# Altium PCB PCB1.PcbDoc
Units mil, origin at the board's own origin, x right, y up, seen from the top; angles counter-clockwise.
Board outline 8120.03 x 5745.03 mil, 2 copper layers (Top Layer, Bottom Layer); 86 components, 126 nets, 431 pads, 20 vias.
Unrouted connection lines stored in the file: 4.
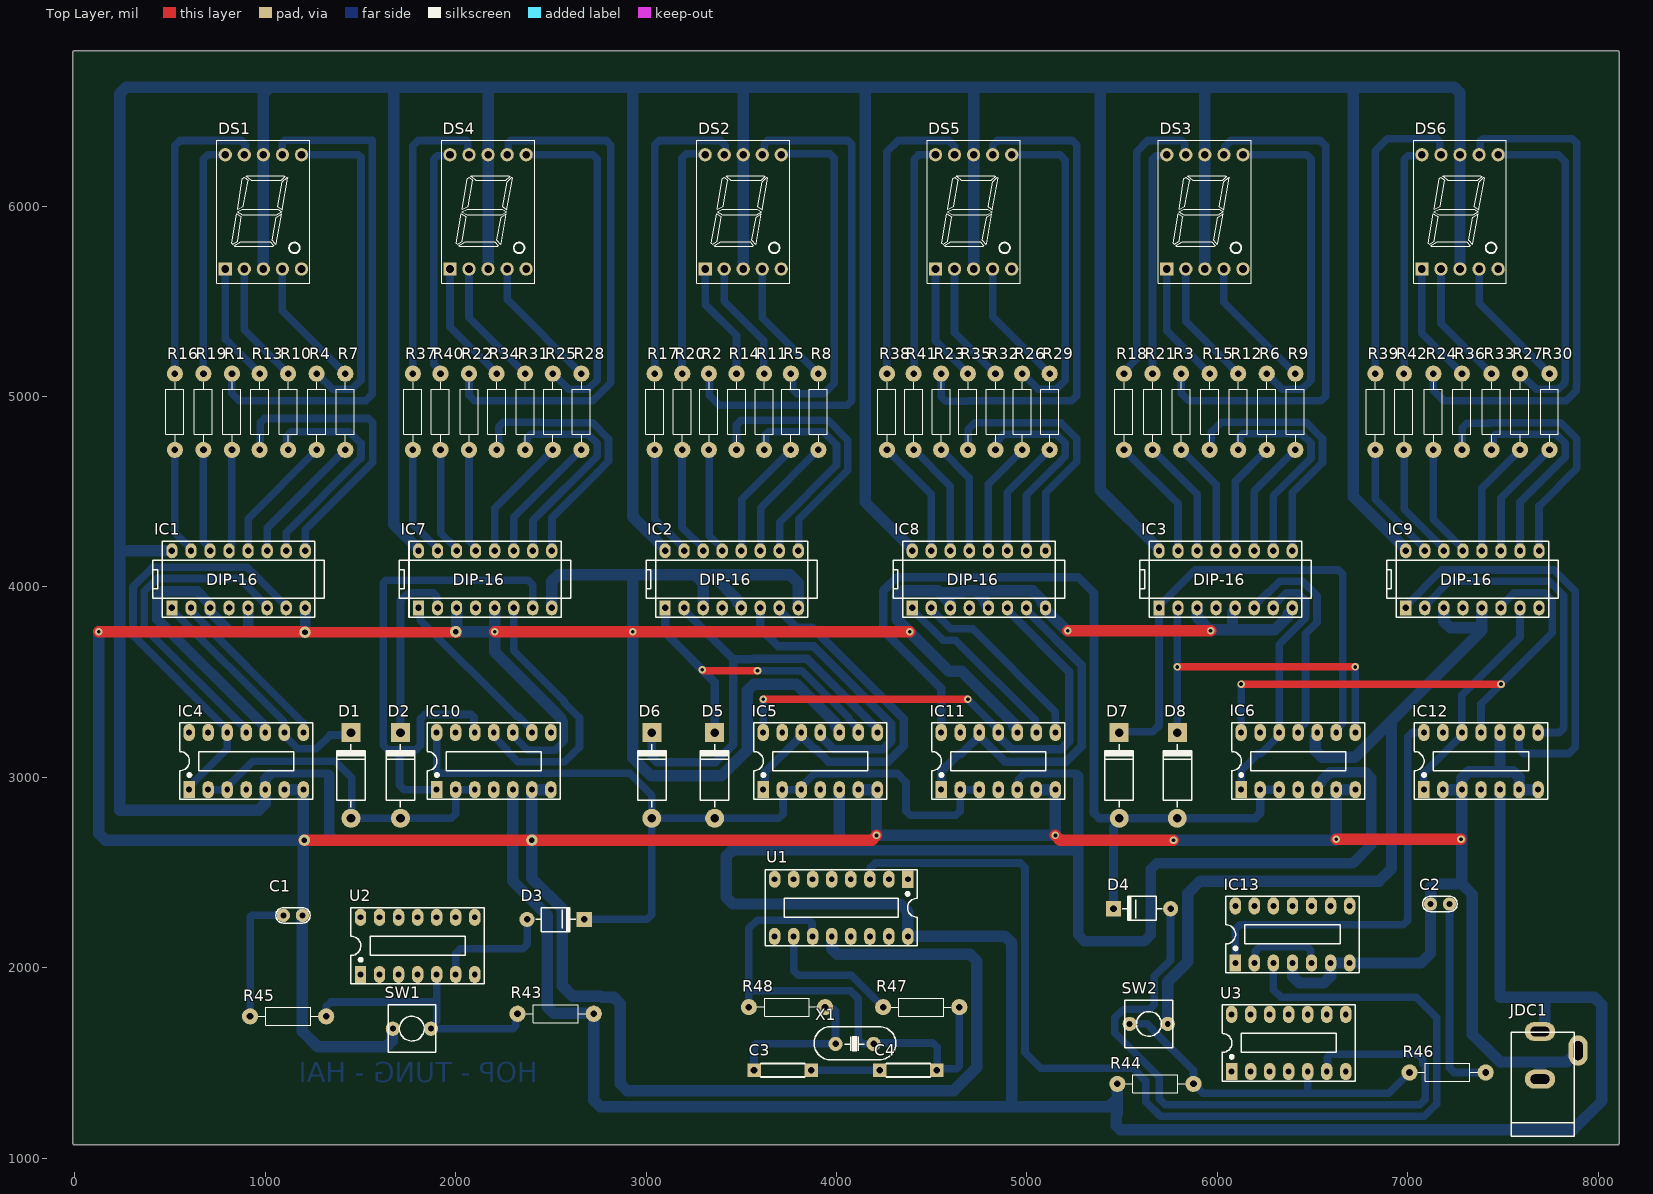
[diagram p0: Top Layer view]
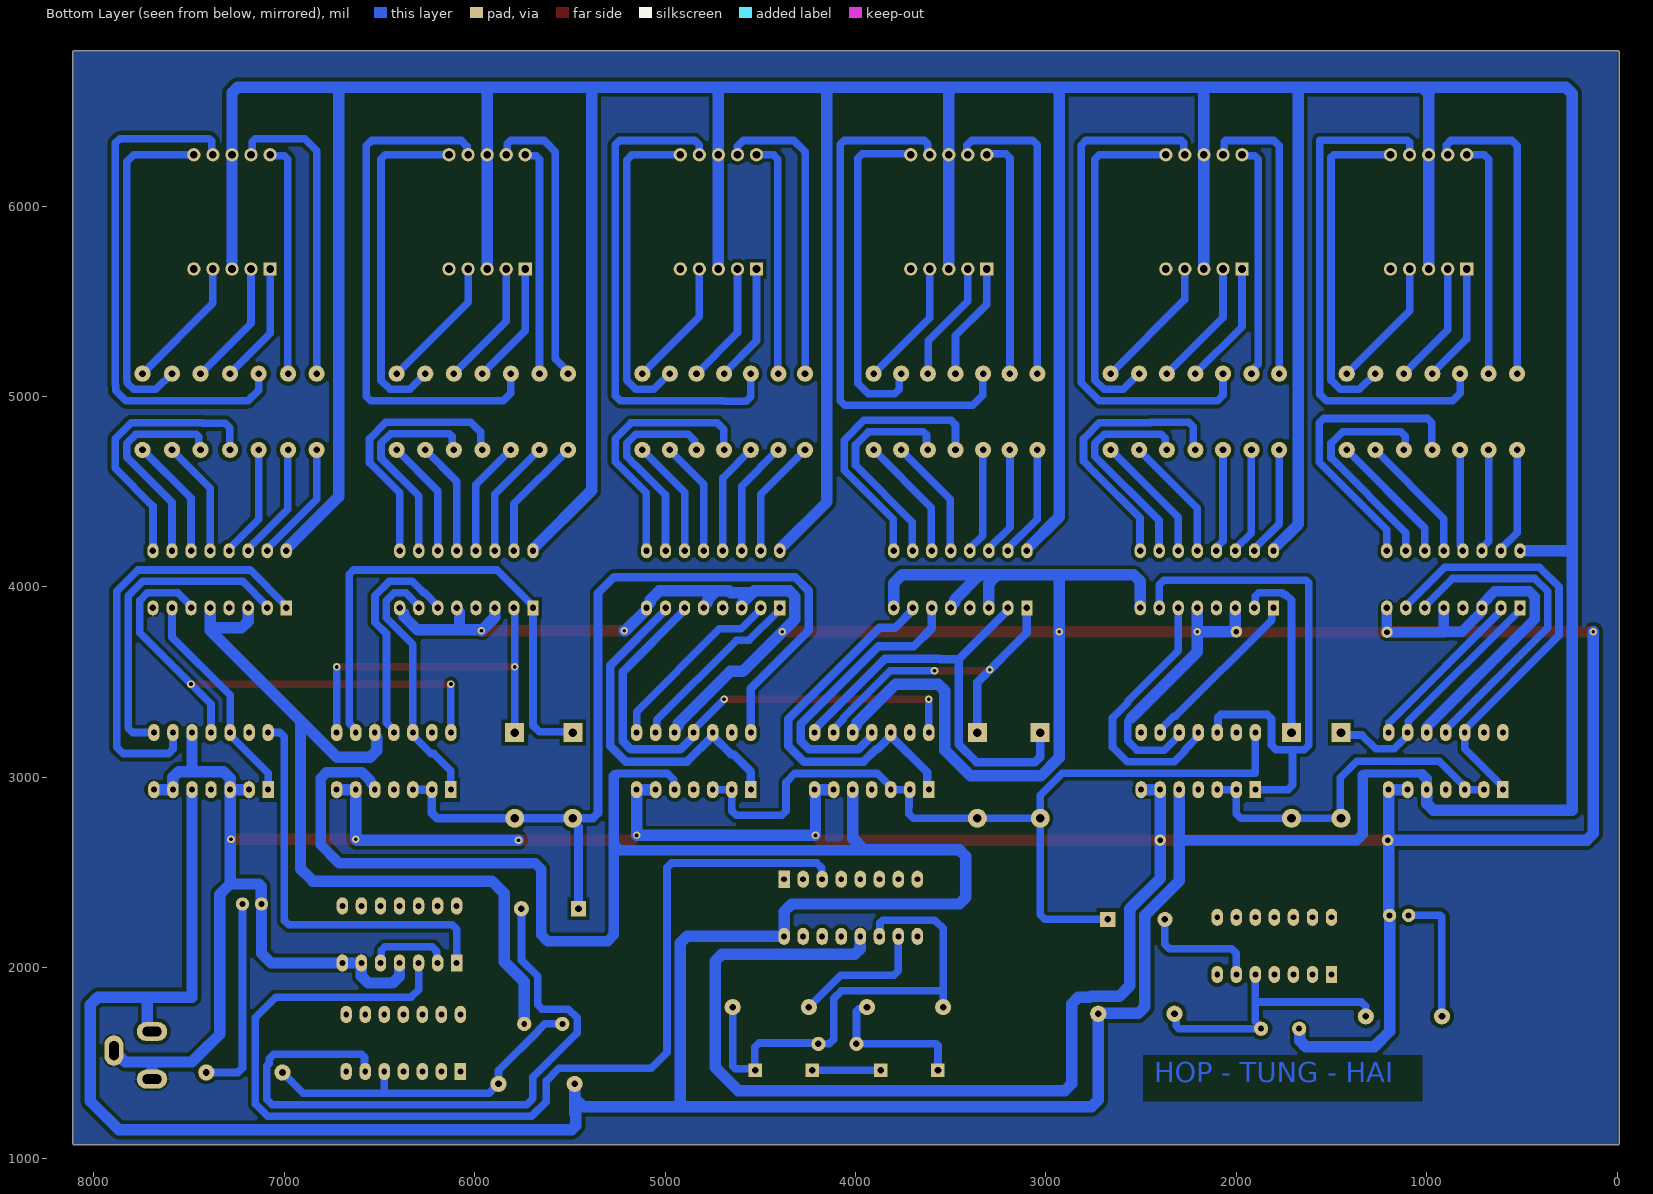
[diagram p1: Bottom Layer view, seen from below]
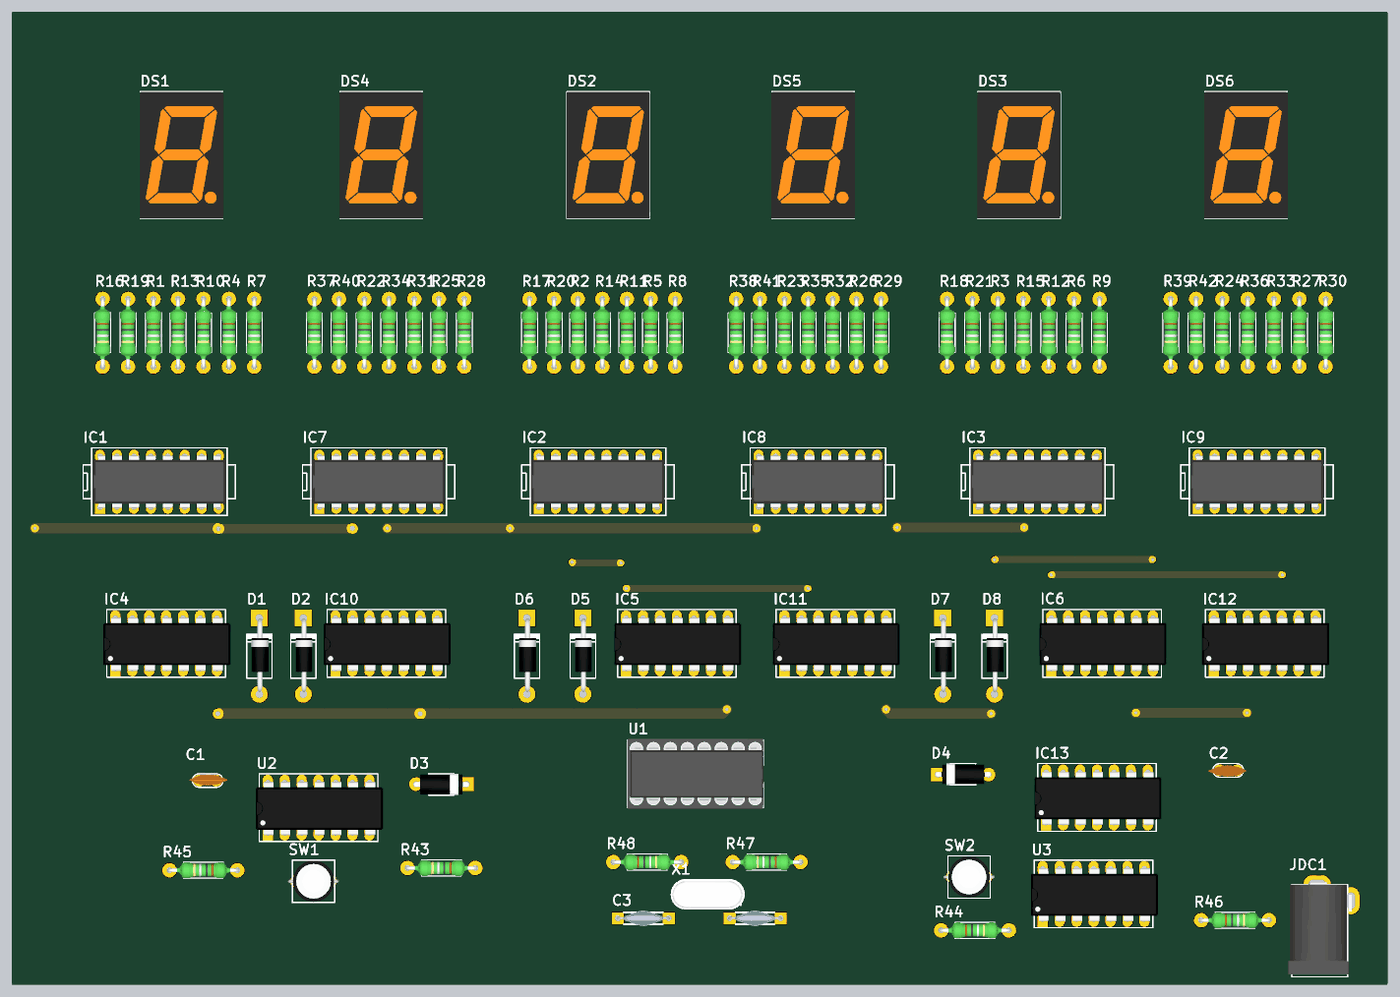
[diagram p2: 3D render of the assembled board from above, using the file's embedded part models]

## Layer stack, top to bottom
Top Solder: solder mask 0.4, Solder Resist, Dk 3.5
Top Layer: signal copper 1.4
Dielectric 1: dielectric 12.6, FR-4, Dk 4.8
Bottom Layer: signal copper 1.4
Bottom Solder: solder mask 0.4, Solder Resist, Dk 3.5

## Board outline
-5,1069.98 cw(c-5,1075) -10.02,1075 -10.02,6810 cw(c-5,6810) -5,6815.02 8105,6815.02 cw(c8105,6810) 8110.01,6810 8110.02,1075 cw(c8105,1075) 8105,1069.98

## Design rules (kind name [scope] priority, off if disabled: settings)
Clearance [All] p1: gap=20 ignorepadtopadclearanceinfootprint=TRUE
PolygonConnect [All] p1: connectstyle=Relief reliefconductorwidth=10 reliefentries=4 polygonreliefangle="90 Angle" airgapwidth=10
RoutingVias [All] p1: holewidth=20 width=40 viastyle="Through Hole" minholewidth=20 minwidth=40 maxholewidth=20 maxwidth=40
SolderMaskExpansion [All] p1: expansion=4 istentingtop=FALSE
Width [All] p1: maxlimit=60 minlimit=40 preferedwidth=55 checkconnectedcopper=TRUE
30 further rules are at their usual default settings.

## Components (designator, comment, footprint, x,y, rotation, side; value= is the part's Value field where it differs from the comment)
C1 "104" "Cap 2.54mm" 1095,2275 r0 top
C2 "104" "Cap 2.54mm" 7220,2335 r180 top
C3 "10pF" "Cap 7.5mm" 3867.07,1461.35 r180 top
C4 "10pF" "Cap 7.5mm" 4527.07,1461.35 r180 top
D1 "1N4007" D2A 1450,3235 r270 top
D2 "1N4007" D2A 1710,3235 r270 top
D3 "1N4007" DO-41 2325,2254.02 r180 top
D4 "1N4007" DO-41 5805,2310 r0 top
D5 "1N4007" D2A 3360,3235 r270 top
D6 "1N4007" D2A 3030,3235 r270 top
D7 "1N4007" D2A 5485,3235 r270 top
D8 "1N4007" D2A 5790,3235 r270 top
DS1 "7SEG" LED7SEG-1-0.56 985,5945 r0 top
DS2 "7SEG" LED7SEG-1-0.56 3505,5945 r0 top
DS3 "7SEG" LED7SEG-1-0.56 5930,5945 r0 top
DS4 "7SEG" LED7SEG-1-0.56 2165,5945 r0 top
DS5 "7SEG" LED7SEG-1-0.56 4715,5945 r0 top
DS6 "7SEG" LED7SEG-1-0.56 7270,5945 r0 top
IC1 "7447" DIP16#1 860,4040 r0 top value="7447 , 74247"
IC2 "7447" DIP16#1 3450,4040 r0 top value="7447 , 74247"
IC3 "7447" DIP16#1 6044.24,4040.08 r0 top value="7447 , 74247"
IC4 "7490" DIP14 600,2935.5 r0 top
IC5 "7490" DIP14 3615,2935.5 r0 top
IC6 "7490" DIP14 6125,2935.5 r0 top
IC7 "7447" DIP16#1 2155,4040 r0 top value="7447 , 74247"
IC8 "7447" DIP16#1 4748.18,4040.08 r0 top value="7447 , 74247"
IC9 "7447" DIP16#1 7340.29,4040.08 r0 top value="7447 , 74247"
IC10 "7490" DIP14 1900,2935.5 r0 top
IC11 "7490" DIP14 4550,2935.5 r0 top
IC12 "7490" DIP14 7085,2935.5 r0 top
IC13 "4013" DIP14 6095,2025 r0 top
JDC1 "Jac DC" DC0 7795,1540 r90 top
R1 "1K" RES-1/4W 830,4935 r90 top
R2 "1K" RES-1/4W 3335,4935 r90 top
R3 "1K" RES-1/4W 5815,4935 r90 top
R4 "1K" RES-1/4W 1275,4935 r90 top
R5 "1K" RES-1/4W 3765,4935 r90 top
R6 "1K" RES-1/4W 6265,4935 r90 top
R7 "1K" RES-1/4W 1425,4935 r90 top
R8 "1K" RES-1/4W 3910,4935 r90 top
R9 "1K" RES-1/4W 6415,4935 r90 top
R10 "1K" RES-1/4W 1125,4935 r90 top
R11 "1K" RES-1/4W 3625,4935 r90 top
R12 "1K" RES-1/4W 6115,4935 r90 top
R13 "1K" RES-1/4W 975,4935 r90 top
R14 "1K" RES-1/4W 3480,4935 r90 top
R15 "1K" RES-1/4W 5965,4935 r90 top
R16 "1K" RES-1/4W 530,4935 r90 top
R17 "1K" RES-1/4W 3050,4935 r90 top
R18 "1K" RES-1/4W 5515,4935 r90 top
R19 "1K" RES-1/4W 680,4935 r90 top
R20 "1K" RES-1/4W 3195,4935 r90 top
R21 "1K" RES-1/4W 5665,4935 r90 top
R22 "1K" RES-1/4W 2075,4935 r90 top
R23 "1K" RES-1/4W 4555,4935 r90 top
R24 "1K" RES-1/4W 7140,4935 r90 top
R25 "1K" RES-1/4W 2515,4935 r90 top
R26 "1K" RES-1/4W 4980,4935 r90 top
R27 "1K" RES-1/4W 7595,4935 r90 top
R28 "1K" RES-1/4W 2665,4935 r90 top
R29 "1K" RES-1/4W 5125,4935 r90 top
R30 "1K" RES-1/4W 7750,4935 r90 top
R31 "1K" RES-1/4W 2370,4935 r90 top
R32 "1K" RES-1/4W 4840,4935 r90 top
R33 "1K" RES-1/4W 7445,4935 r90 top
R34 "1K" RES-1/4W 2220,4935 r90 top
R35 "1K" RES-1/4W 4695,4935 r90 top
R36 "1K" RES-1/4W 7290,4935 r90 top
R37 "1K" RES-1/4W 1780,4935 r90 top
R38 "1K" RES-1/4W 4270,4935 r90 top
R39 "1K" RES-1/4W 6835,4935 r90 top
R40 "1K" RES-1/4W 1925,4935 r90 top
R41 "1K" RES-1/4W 4410,4935 r90 top
R42 "1K" RES-1/4W 6985,4935 r90 top
R43 "10K" RES-1/4W 2540,1753.3 r0 top
R44 "10K" RES-1/4W 5660,1395 r180 top
R45 "10K" RES-1/4W 1135,1740 r0 top
R46 "10K" RES-1/4W 7195,1455 r180 top
R47 "47M" RES-1/4W 4460,1788.3 r0 top
R48 "2k2" RES-1/4W 3725,1798.31 r180 top
SW1 "SW" "SW2 6x6MM Circle" 1670,1680 r0 top value="SW chip 2 pin"
SW2 "SW" "SW2 6x6MM Circle" 5740,1705 r180 top value="SW chip 2 pin"
U1 "4060" DIP16#2 3670,2465 r270 top
U2 "7414" DIP14 1500,1965 r0 top
U3 "7414" DIP14 6075,1455 r0 top
X1 "32856Mhz" XT2 4095,1600 r0 top value=4Mhz

## Footprints (in the part's own frame and the unit in brackets; to place one, negate y for a bottom-side part, rotate by r counter-clockwise, add the part's x,y. Pads: shape width x height; smd on the part's side, far side on the other; paste and mask are expansions set on the pad)
"Cap 2.54mm" [mil]
  round 70 hole 31: 1(0,0) 2(100,0)
  silkscreen extent -40,-40 141,40, body extent -60,-30 170,37, height 265
"Cap 7.5mm" [mm] "103 2KV"
  rect 1.8x1.8 hole 0.9: 1(0,0) 2(7.62,0)
  silkscreen extent 0.89,-0.89 6.73,0.89, body extent -0.19,-1.2 7.81,1.19, height 9.03
D2A [mil] "Diode 2A, W 150mil, L 450mil"
  round 100 hole 45: 1(450,0)
  rect 100x100 hole 45: 2(0,0)
  silkscreen extent 61,-75 391,75, body extent 5,-47 435,54, height 100
DC0 [mil] "Jac DC input"
  oval 100x160 hole 50 slot 100 at 90 deg: 1(125,100) 2(-125,100)
  oval 160x100 hole 50 slot 100 at 0 deg: 3(25,-100)
  silkscreen extent -425,-80 120,250, body extent -410,-105 134,269, height 434
DIP14 [mil] "DIP, 14-Leads, Row Spacing 7.62mm, Pitch 2.54mm, Body 19.2x6.6mm"
  rect 60x90 hole 31: 1(0,0)
  oval 60x90 hole 31: 2(100,0) 3(200,0) 4(300,0) 5(400,0) 6(500,0) 7(600,0) 8(600,300) 9(500,300) 10(400,300) 11(300,300) 12(200,300) 13(100,300) 14(0,300)
  silkscreen extent -50,-50 650,350, body extent -70,-12 680,302, height 145
DIP16#1 [mm]
  rect 1.5x2 hole 0.864: 1(-8.897,-3.812)
  oval 1.5x2 hole 0.864: 2(-6.357,-3.812) 3(-3.817,-3.812) 4(-1.277,-3.812) 5(1.263,-3.812) 6(3.803,-3.812) 7(6.343,-3.812) 8(8.883,-3.812) 9(8.883,3.808) 10(6.343,3.808) 11(3.803,3.808) 12(1.263,3.808) 13(-1.277,3.808) 14(-3.817,3.808) 15(-6.357,3.808) 16(-8.897,3.808)
  silkscreen extent -11.44,-5.08 11.42,5.08, body extent -10,-3.93 10,3.94, height 1.99
DIP16#2 [mm] "16 PIN, W 300mil, Pin to pin 100mil"
  rect 2.286x1.524 hole 0.787: 1(0,17.907)
  oval 2.286x1.524 hole 0.787: 2(0,15.367) 3(0,12.827) 4(0,10.287) 5(0,7.747) 6(0,5.207) 7(0,2.667) 8(0,0.127) 9(7.62,0.127) 10(7.62,2.667) 11(7.62,5.207) 12(7.62,7.747) 13(7.62,10.287) 14(7.62,12.827) 15(7.62,15.367) 16(7.62,17.907)
  silkscreen extent -1.27,-1.14 8.89,19.19, body extent -1.46,-1.19 9.04,19.22, height 7.61
DO-41 [mil] "Diode 1A"
  round 80 hole 35: 1(-50,0)
  rect 80x80 hole 35: 2(-350,0)
  silkscreen extent -305,-61 -95,65, body extent -366,-61 -34,65, height 122
LED7SEG-1-0.56 [mil]
  rect 70x70 hole 40: 1(-195,-275)
  round 70 hole 40: 2(-95,-275) 3(5,-275) 4(105,-275) 5(205,-275) 6(205,325) 7(105,325) 8(5,325) 9(-95,325) 10(-195,325)
  silkscreen extent -239,-350 249,400, body extent -241,-349 251,399, height 315
RES-1/4W [mil]
  round 85 hole 35: 1(-215,5) 2(185,5)
  silkscreen extent -173,-42 141,52, body extent -227,-42 197,52, height 95
"SW2 6x6MM Circle" [mil] "SW button 2pin, 250x 250 mil 6x6mm"
  round 75 hole 31: 1(0,0) 2(200,0)
  silkscreen extent -25,-125 225,125, body extent -52,-122 251,122, height 181
XT2 [mil] "Footpin for Crystal 2 pin"
  round 75 hole 34: 1(-100,0) 2(100,0)
  silkscreen extent -213,-83 217,90, body extent -216,-87 216,90, height 144

## Part data
C1 C2 C3 C4: library part CN, "Capacitor"
D1 D2 D5 D6 D7 D8: library part D1A, "Diode 1A"
D3 D4: library part "Diode 1A", "Diode 1A 1N4007 DO-41"
DS1 DS2 DS3 DS4 DS5 DS6: library part LED7SEG-1, "14.2 mm General Purpose Blue 7-Segment Display: CC, RH DP, Gray Surface", Colour=Blue, PackageDocument=24-Sep-2002, ComponentLink1Description="Manufacturer Link", ComponentLink1URL=http://www.agilent.com/, DatasheetDocument=24-Sep-2002, LatestRevisionDate=17-Dec-2003, LatestRevisionNote="Schematic revised, PCB Footprint replaced.", MinimumIntensity="2020 ucd", Note="IF = 10 mA", PackageReference=H, Published=8-Jun-2000, Publisher="Altium Limited"
IC1 IC2 IC3 IC7 IC8 IC9: "BCD to 7-Segment Decoder/Driver"
IC4 IC5 IC6 IC10 IC11 IC12: "4-Bit Decade Counter"
IC13: "Dual D-Type Flip-Flop", Creat by=VanDungEvn@Gmail.com
JDC1: library part DCIN, "Jac DC input"
R1 R2 R3 R4 R5 R6 R7 R8 R9 R10 R11 R12 R13 R14 R15 R16 R17 R18 R19 R20 R21 R22 R23 R24 R25 R26 R27 R28 R29 R30 R31 R32 R33 R34 R35 R36 R37 R38 R39 R40 R41 R42 R43 R44 R45 R46 R47 R48: library part Res
SW1 SW2: library part SW2, "Switch button 2 pin"
U2 U3: "IC, M74HC04M, Hex Inverter, SO-14", Text Field1=ST, Text Field2=M74HC04M1R, Text Field3=Mouser, Text Field4=511-M74HC04M, Text Field5=SO-14, Text Field6=.22
X1: library part XT2, "Crystal, 32.768 KHz, -40 to 85 degC, 3.2 x 1.5 x 0.9 mm SMD"

## Free pads (board coordinates)
  round 60 hole 30: 2(1208.74,3762.5) 3(2000,3765) 4(1205,2670) 5(2400,2670)

## Via types
v1: diameter 40, hole 20, Top Layer to Bottom Layer, 20 vias

## Nets (pads, with @x,y where several pads share a name; then routed paths per layer and width w, separated by ;. In a path a pad name is that pad's centre, name@x,y a point inside that pad or via, vN(x,y) a via of type N, cw(c..) or ccw(c..) an arc to the next point about the centre after c; other vN are vias at no path point)
5: IC13.2 IC13.5 | length 439.6
  Bottom Layer w40: IC13.2 6198.83,2028.83 6198.83,2085.4 6223.43,2110 6471.57,2110 6491.17,2090.4 6491.17,2028.83 IC13.5
+5: DS1.3 DS1.8 DS2.3 DS2.8 DS3.3 DS3.8 DS4.3 DS4.8 DS5.3 DS5.8 DS6.3 DS6.8 IC1.16 IC2.16 IC3.16 IC4.5 IC5.5 IC6.5 IC7.16 IC8.16 IC9.16 IC10.5 IC11.5 IC12.5 JDC1.1 R43.2 R44.2 U1.16 | length 50750.5
  Bottom Layer w40: 1025.5,3020.5 1324.5,3020.5 1335,3010 ; IC11.5 4953.83,2939.33 4953.83,2986.57 4987.76,3020.5 5254.5,3020.5 5265,3010
  Bottom Layer w55: IC4.5 1000.96,2936.46 1000.96,2992.96 1025.5,3017.5 ; 1335,3010 1335,2702.22 1367.22,2670 2295,2670 2300,2675 ; 3955,2617.5 5237.78,2617.5 5270,2649.72 ; 5265,3010 5270,3005 5270,2649.72 ; IC6.5 6525,2951.85 6547.5,2974.35 6547.5,2982.6 6592.9,3028 6777.56,3028 6809.78,2995.78 6809.78,2646.88 6712.9,2550 5682.22,2550 5650,2517.78 5650,2172.22 5617.78,2140 5302.22,2140 5270,2172.22 5270,2649.72
  Bottom Layer w60: IC1.16 245.25,4189.92 235.18,4200 ; DS1.3 DS1.8 990,6589.85 1025.15,6625 ; IC4.5 1000,2862.19 964.85,2827.04 235.18,2827.04 235.18,4200 ; IC7.16 1804.71,4198.82 1675,4328.53 1675,6625 ; DS4.3 DS4.8 2170,6615 2180,6625 ; IC10.5 2300,2675 2300,2456.3 2480,2276.3 2480,1795.15 2515.15,1760 2723.3,1760 R43.2 2725,1305.15 2760.15,1270 5430.07,1270 5470.22,1310.15 ; IC2.16 3099.71,4198.82 2930,4368.53 2930,6625 ; DS2.3 DS2.8 3510,6615 3520,6625 ; IC5.5 4015,2680 3955,2620 3455.15,2620 3420,2584.85 3420,2370.15 3455.15,2335 4334.85,2335 4375,2294.85 U1.16 4884.85,2165 4920,2129.85 4920,1290 ; IC8.16 4397.88,4198.9 4150,4446.78 4150,6615 4140,6625 ; DS5.3 DS5.8 4720,6625 ; R44.2 5475,1234.78 5470.22,1230 5470.22,1169.93 5490.15,1150 7870,1150 8020,1300 8020,1805 7980,1845 7720,1845 ; IC3.16 5693.94,4198.9 5385,4507.84 5385,6625 ; DS3.3 DS3.8 5935,6625 ; IC9.16 6990,4198.9 6715,4473.9 6715,6625 ; DS6.3 DS6.8 7275,6594.85 7244.85,6625 6715,6625 ; IC12.5 7485,1845 7720,1845 ; JDC1.1 7701.52,1665 7720,1683.48 7720,1845 ; 235.18,4200 235.18,6590.28 269.9,6625 1025.15,6625 ; 1025.15,6625 1675,6625 ; 1675,6625 2180,6625 ; 2180,6625 2930,6625 ; 2930,6625 3520,6625 ; 3520,6625 4140,6625 ; 4140,6625 4720,6625 ; 4720,6625 5385,6625 ; 5385,6625 5935,6625 ; 5935,6625 6715,6625
G: D1.1 D2.1 IC4.2 IC4.3 IC10.2 IC10.3 | length 1863
  Bottom Layer w40: IC4.2 IC4.3 806.53,2942.03 806.53,2957.03 934.5,3085 1367.07,3085 1455,2997.07 1455,2790 D1.1 D2.1 1976.57,2785 2000,2808.43 IC10.2 IC10.3
G1: IC1.7 IC4.1 IC4.12 | length 2295.6
  Bottom Layer w40: IC4.1 600,2950.5 800,3150.5 IC4.12 793.47,3242.03 793.47,3257.03 305.18,3745.32 305.18,4001.78 407.69,4104.29 905.18,4104.29 1109.71,3899.77 IC1.7
G2: D1.2 IC1.1 IC4.9 | length 1327.9
  Bottom Layer w40: IC1.1 509.71,3880.08 1096.17,3293.61 1096.17,3239.33 IC4.9 1100,3220.5 1170,3150.5 1268.25,3150.5 1340,3222.25 1437.25,3222.25 D1.2
G3: IC1.2 IC4.8 | length 898.9
  Bottom Layer w40: IC1.2 609.71,3875.69 1200,3285.39 IC4.8
G4: IC1.6 IC4.11 | length 1705.1
  Bottom Layer w40: IC4.11 893.47,3242.03 893.47,3257.03 365.18,3785.32 365.18,3976.93 432.54,4044.29 865.18,4044.29 1009.71,3899.77 IC1.6
G5: IC7.7 IC10.1 IC10.12 | length 2902.3
  Bottom Layer w40: IC10.1 1728.43,2935.5 1705,2958.93 1705,3132.5 1717.5,3145 ; IC10.12 2096.17,3239.33 2096.17,3315.4 2081.57,3330 1838.43,3330 1815,3306.57 1815,3168.43 1791.57,3145 1717.5,3145 ; IC7.7 2404.71,4011.57 2381.27,4035 1633.43,4035 1619.29,4020.86 1619.29,3925.56 1620,3924.85 1620,3168.43 1643.43,3145 1717.5,3145
G6: IC7.1 IC10.9 | length 906.6
  Bottom Layer w40: IC7.1 1814.23,3880.4 1814.23,3825.77 2319.5,3320.5 2328.99,3320.5 2400,3249.49 IC10.9
G7: D2.2 IC7.2 IC10.8 | length 972.6
  Bottom Layer w40: D2.2 1710,3930 1740,3960 1749.32,3960 1759.32,3970 1881.27,3970 1901.06,3950.21 1901.06,3893.57 IC7.2
G8: IC4.14 IC7.6 IC10.11 | length 1436.1
  Bottom Layer w40: IC10.11 2200,3215.44 2271.72,3143.72 2271.72,3136.65 2308.37,3100 2326.87,3081.5 2573.13,3081.5 2650,3158.37 2650,3312.63 2570,3392.63 2570,3398.75 2304.71,3664.04 IC7.6
GIO: D3.2 D5.1 D6.1 IC5.2 IC5.3 IC10.14 IC11.2 IC11.3 | length 4594.2
  Bottom Layer w40: IC10.14 1900,3021.5 2913.34,3021.5 3030,2904.84 D6.1 ; D3.2 3006.57,2254.02 3030,2277.45 D6.1 ; IC11.3 IC11.2 4650,2823.43 4626.57,2800 4388.43,2800 4365,2823.43 4365,2975 4319.5,3020.5 3885,3020.5 3815,2950.5 IC5.3 IC5.2 3718.83,2931.67 3718.83,2849.6 3720,2848.43 3720,2808.43 3696.57,2785 D5.1 D6.1
GND: C1.2 C2.2 IC1.3 IC1.5 IC1.8 IC2.3 IC2.5 IC2.8 IC3.3 IC3.5 IC3.8 IC4.6 IC4.7 IC4.10 IC5.6 IC5.7 IC5.10 IC6.6 IC6.7 IC6.10 IC7.3 IC7.5 IC7.8 IC8.3 IC8.5 IC8.8 IC9.3 IC9.5 IC9.8 IC10.6 IC10.7 IC10.10 IC11.6 IC11.7 IC11.10 IC12.2 IC12.3 IC12.6 IC12.7 IC12.10 IC13.4 IC13.6 IC13.7 JDC1.2 JDC1.3 pad.2 pad.3 pad.4 pad.5 SW1.1 SW2.1 U1.12 | length 41208.6
  Top Layer w55: v1(1208.74,3762.5) 1996.15,3762.5 1997.69,3764.04 pad.3@1998.37,3763.37
  Top Layer w60: v1(125,3765) 1206.24,3765 v1(1208.74,3762.5) ; pad.4 4185,2670 v1(4210,2695) ; pad.3 pad.3@2002.5,3762.5 ; v1(2205,3765) v1(4385,3765) ; v1(5150,2695) 5175,2670 v1(5770,2670) ; v1(5215,3770) v1(5965,3770) ; v1(6625,2675) v1(7280,2675)
  Bottom Layer w40: IC10.10 2300,3220.5 2377.5,3143 2521.49,3143 2570,3191.51 2570,3293.64 2551.82,3311.82
  Bottom Layer w55: IC1.3@710.48,3901.64 710.48,3878.21 711.23,3877.46 711.23,3869.62 815.85,3765 915,3765 910.48,3769.52 910.48,3889.15 IC1.5 ; IC1.3@711.23,3907.17 641.61,3976.79 460.5,3976.79 432.68,3948.97 432.68,3830.88 IC4.10@999.04,3264.51 ; 910.48,3762.5 v1(1208.74,3762.5) 1209.71,3832.22 IC1.8
  Bottom Layer w60: v1(125,3765) 125.15,3764.85 125.15,2705.15 160.29,2670 pad.4@1200,2670 ; IC4.6 IC4.7 pad.4@1200,2670 ; pad.4 pad.4@1200,2670 ; SW1.1 1667.13,1677.13 1667.13,1617.28 1634.85,1585 1275,1585 1195,1665 C1.2 1195,2277.71 1200,2282.71 pad.4@1200,2670 ; IC7.3 2004.71,3790.29 pad.3 v1(2205,3765) ; IC7.5 2205,3889.63 v1(2205,3765) ; IC10.7 IC10.6 pad.5 2400,2469.43 2560,2309.43 2560,1905 2614.2,1850.8 2763.31,1850.8 2769.11,1845 2829.85,1845 2865,1809.85 2865,1390.15 2900.15,1355 4615.56,1355 4737.5,1476.94 4737.5,2034.85 4702.35,2070 4005.15,2070 3975,2100.15 U1.12 ; IC7.8 2504.71,4029.85 2539.85,4065 2930,4065 ; 2551.82,3311.82 2204.71,3658.93 2204.71,3711.82 2205,3712.11 v1(2205,3765) ; 3264.56,4054.44 3299.71,4019.29 IC2.3 ; 3357.5,4054.44 3479.23,3932.71 3479.23,3919.29 3499.71,3898.82 IC2.5 ; IC2.8 3799.71,4020.29 3755,4065 2930,4065 ; IC5.10 4015,3250.5 3995,3270.5 3995,3283.64 3788.64,3490 3566.12,3490 3530.97,3454.85 3530.97,3143.33 3395.13,3007.5 3026.33,3007.5 2930,3103.83 v1(2930,3765) 2930,4065 ; IC5.6 IC5.7 4215,2920.5 4210,2915.5 v1(4210,2695) v1(5150,2695) IC11.7 IC11.6 ; 4540.19,3970 4655.57,3970 4664.94,3979.37 4730.82,3979.37 ; IC8.3 4597.41,3890.47 4597.41,3912.78 4530.82,3979.37 4347.64,3979.37 4318.35,3950.08 4318.35,3829.92 4591.5,3556.78 4656.86,3556.78 4930,3283.64 4930,3270.5 4950,3250.5 IC11.10 ; IC8.5 4797.88,3898.9 4777.41,3919.37 4777.41,3932.78 4730.82,3979.37 ; IC8.8 5097.88,3898.9 5077.41,3919.37 5077.41,3932.78 5030.82,3979.37 4730.82,3979.37 ; IC8.8@5098.35,3880.63 5208.98,3770 v1(5215,3770) ; SW2.1 5740,1926.01 5845,2031.01 5845,2390 5910,2455 6850,2455 6915,2520 6915,3297.36 ; v1(5770,2670) 6620,2670 v1(6625,2675) IC6.6 IC6.7 ; IC3.3 5894.41,3889.53 5894.41,3840.59 v1(5965,3770) 5969.41,3774.41 6085.59,3774.41 ; IC3.5 6093.94,3881.1 6080,3867.16 6080,3780 6085.59,3774.41 ; IC3.8 6393.94,3881.1 6373.47,3860.63 6373.47,3847.22 6300.67,3774.41 6085.59,3774.41 ; IC13.4 6395,1955.15 6430.15,1920 6559.85,1920 6595,1955.15 IC13.6 IC13.7 7069.85,2025 7120,2075.15 C2.2 7121.91,2336.91 7121.91,2426.62 7135.15,2439.85 7285,2439.85 ; IC6.10 6525,3220.5 6515,3210.5 6515,3140.65 6550.15,3105.5 6723.14,3105.5 6915,3297.36 ; IC12.2 IC12.3 ; IC9.3 7190,3820.15 7225.15,3785 7376.42,3785 7389.53,3771.89 ; IC9.5 7389.53,3889.53 7389.53,3771.89 ; IC12.10 7485,3040.5 7475,3030.5 ; IC12.7 IC12.6 7585,3000.35 7554.85,3030.5 7475,3030.5 ; JDC1.2 7695,1505 ; JDC1.3 7895,1545.82 7876.52,1527.35 7857.35,1527.35 7835,1505 7695,1505 ; 6915,3297.36 7389.53,3771.89 ; 7285,2439.85 IC12.3 ; 7285,2439.85 7340,2384.85 7340,1650 7447.5,1542.5 7448.31,1542.5 7485.82,1505 7695,1505 ; IC12.3 7285,2994.85 7320.65,3030.5 7475,3030.5
NetC1_1: C1.1 R45.1 | length 700.1
  Bottom Layer w40: R45.1 920,2266.57 928.43,2275 C1.1
NetC2_1: C2.1 R46.1 | length 1061.3
  Bottom Layer w40: C2.1 7220,1473.43 7243.43,1450 R46.1
NetC3_1: C3.1 C4.2 | length 360
  Bottom Layer w40: C3.1 C4.2
NetC3_2: C3.2 R48.1 X1.1 | length 797.2
  Bottom Layer w40: C3.2 3567.07,1591.57 3575.5,1600 X1.1 3995,1771.57 3981.87,1784.7 3948.61,1784.7 R48.1
NetC4_1: C4.1 R47.2 R48.2 U1.11 X1.2 | length 2617.2
  Bottom Layer w40: R48.2 3540,1965 3540,2206.57 3583.43,2250 3856.57,2250 3871.17,2235.4 3871.17,2168.83 U1.11 ; 3563.43,1880 4073.44,1880 4115,1838.44 4115,1623.43 4138.43,1600 X1.2 4200,1605 4506.57,1605 4530,1581.57 C4.1@4530,1470 ; C4.1 4527.07,1467.93 4525,1470 C4.1@4530,1470 ; R47.2 4645,1483.43 4631.57,1470 C4.1@4530,1470
NetD3_1: D3.1 U2.6 | length 636.6
  Bottom Layer w40: U2.6 2000,2076.57 2023.43,2100 2351.57,2100 2375,2123.43 D3.1
NetD4_1: D4.1 U3.6 | length 3530.1
  Bottom Layer w40: D4.1 5754.29,2309.29 5754.29,2039.29 5670,1955 5670,1805.93 5646.57,1782.5 5507.9,1782.5 5462.5,1737.1 5462.5,1657.5 5694.85,1425.15 5694.85,1311.86 5726.72,1280 7062.99,1280 7092.5,1309.51 7092.5,1484.17 7080,1496.67 7080,1521.57 7056.57,1545 6595,1545 6578.83,1528.83 6578.83,1458.83 U3.6
NetDS1_1: DS1.1 R13.2 | length 625.6
  Bottom Layer w40: DS1.1 790,5302.5 R13.2@972.5,5120
NetDS1_2: DS1.2 R10.2 | length 646
  Bottom Layer w40: DS1.2 890,5351.66 R10.2@1121.66,5120
NetDS1_4: DS1.4 R7.2 | length 686.7
  Bottom Layer w40: DS1.4 1090,5450 R7.2
NetDS1_6: DS1.6 R4.2 | length 1774.7
  Bottom Layer w40: DS1.6 1489.07,6270 1502.5,6256.57 1502.5,5085.83 1454.17,5037.5 1353.33,5037.5 R4.2@1270.83,5120
NetDS1_7: DS1.7 R1.2 | length 2749
  Bottom Layer w40: R1.2@823.33,5120 823.33,5016.67 862.5,4977.5 1526.57,4977.5 1562.5,5013.43 1562.5,6346.57 1101.57,6346.57 1090,6335 DS1.7
NetDS1_9: DS1.9 R16.2 | length 1642.7
  Bottom Layer w40: R16.2 525,6316.57 553.43,6345 872.31,6345 895.74,6321.57 895.74,6275.74 DS1.9
NetDS1_10: DS1.10 R19.2 | length 1252.1
  Bottom Layer w40: R19.2@674.16,5120 674.16,6246.57 697.6,6270 DS1.10
NetDS2_1: DS2.1 R14.2 | length 618.3
  Bottom Layer w40: DS2.1 3310,5483.59 3475,5318.59 R14.2
NetDS2_2: DS2.2 R11.2 | length 636.3
  Bottom Layer w40: DS2.2 3410,5501.2 3618.33,5292.86 R11.2@3618.33,5120
NetDS2_4: DS2.4 R8.2 | length 672.2
  Bottom Layer w40: DS2.4 3610,5415 R8.2
NetDS2_6: DS2.6 R5.2 | length 1805.6
  Bottom Layer w40: DS2.6 3715,6275 3964.07,6275 3987.5,6251.57 3987.5,5070.1 3932.4,5015 3793.71,5015 3770.27,5038.43 3770.27,5111.39 R5.2@3761.66,5120
NetDS2_7: DS2.7 R2.2 | length 2776
  Bottom Layer w40: R2.2@3331.66,5120 3331.66,5006.66 3383.33,4955 4056.57,4955 4080,4978.43 4080,6325 4060,6345 3638.43,6345 3620,6326.57 3620,6288.12 3610,6278.12 DS2.7
NetDS2_9: DS2.9 R17.2 | length 1643.7
  Bottom Layer w40: R17.2 3045,6321.57 3068.43,6345 3390,6345 3415,6320 3415,6275 DS2.9
NetDS2_10: DS2.10 R20.2 | length 1265
  Bottom Layer w40: R20.2@3188.33,5120 3188.33,6251.57 3211.76,6275 3305,6275 DS2.10
NetDS3_1: DS3.1 R15.2 | length 643.2
  Bottom Layer w40: DS3.1 5735,5345 R15.2
NetDS3_2: DS3.2 R12.2 | length 663.9
  Bottom Layer w40: DS3.2 5835,5395 R12.2
NetDS3_4: DS3.4 R9.2 | length 705.3
  Bottom Layer w40: DS3.4 6035,5495 R9.2
NetDS3_6: DS3.6 R6.2 | length 1814.6
  Bottom Layer w40: DS3.6 6469.07,6270 6492.5,6246.57 6492.5,5085.83 6444.17,5037.5 6342.5,5037.5 R6.2
NetDS3_7: DS3.7 R3.2 | length 2804.4
  Bottom Layer w40: R3.2 5810,5018.43 5850.93,4977.5 6546.57,4977.5 6570,5000.93 6570,6316.57 6541.57,6345 6071.21,6345 6040.74,6314.53 6040.74,6275.74 DS3.7
NetDS3_9: DS3.9 R18.2 | length 1538.1
  Bottom Layer w40: R18.2 5510,5131.35 5576.81,5198.15 5576.81,6286.81 5635,6345 5811.57,6345 5829.26,6327.31 5829.26,6275.74 DS3.9
NetDS3_10: DS3.10 R21.2 | length 1211.3
  Bottom Layer w40: R21.2 5660,6246.57 5677.69,6264.26 5729.26,6264.26 DS3.10
NetDS4_1: DS4.1 R34.2 | length 652.5
  Bottom Layer w40: DS4.1 1970,5367.5 R34.2@2217.5,5120
NetDS4_2: DS4.2 R31.2 | length 672.2
  Bottom Layer w40: DS4.2 2070,5415 R31.2
NetDS4_4: DS4.4 R28.2 | length 711.5
  Bottom Layer w40: DS4.4 2270,5510 R28.2
NetDS4_6: DS4.6 R25.2 | length 1827.1
  Bottom Layer w40: DS4.6 2719.07,6270 2742.5,6246.57 2742.5,5085.83 2694.17,5037.5 2595,5037.5 R25.2@2512.5,5120
NetDS4_7: DS4.7 R22.2 | length 2776.3
  Bottom Layer w40: R22.2 2070,5005.93 2098.43,4977.5 2719.03,4977.5 2815,5073.47 2815,6320 2790,6345 2289.17,6345 2275.74,6331.57 2275.74,6275.74 DS4.7
NetDS4_9: DS4.9 R37.2 | length 1570.5
  Bottom Layer w40: R37.2 1775,6316.57 1803.43,6345 2056.57,6345 2064.26,6337.31 2064.26,6275.74 DS4.9
NetDS4_10: DS4.10 R40.2 | length 1236.8
  Bottom Layer w40: R40.2@1922.5,5120 1922.5,5132.18 1885,5169.68 1885,6246.57 1902.69,6264.26 1964.26,6264.26 DS4.10
NetDS5_1: DS5.1 R35.2 | length 621.5
  Bottom Layer w40: DS5.1 4520,5292.5 R35.2@4692.5,5120
NetDS5_2: DS5.2 R32.2 | length 639.1
  Bottom Layer w40: DS5.2 4620,5335 R32.2
NetDS5_4: DS5.4 R29.2 | length 674.3
  Bottom Layer w40: DS5.4 4820,5420 R29.2
NetDS5_6: DS5.6 R26.2 | length 1729.2
  Bottom Layer w40: DS5.6 5174.07,6270 5202.5,6241.57 5202.5,5085.83 5154.17,5037.5 5060,5037.5 R26.2@4977.5,5120
NetDS5_7: DS5.7 R23.2 | length 2687.2
  Bottom Layer w40: R23.2 4550,4998.43 4573.43,4975 4690,4975 4692.5,4977.5 5236.57,4977.5 5262.5,5003.43 5262.5,6321.57 5239.07,6345 4843.43,6345 4820,6321.57 DS5.7
NetDS5_9: DS5.9 R38.2 | length 1603.2
  Bottom Layer w40: R38.2 4265,6286.57 4323.43,6345 4590,6345 4620,6315 DS5.9
NetDS5_10: DS5.10 R41.2 | length 1248.8
  Bottom Layer w40: R41.2@4407.5,5120 4407.5,6246.57 4430.93,6270 DS5.10
NetDS6_1: DS6.1 R36.2 | length 638
  Bottom Layer w40: DS6.1 7075,5332.5 R36.2@7287.5,5120
NetDS6_2: DS6.2 R33.2 | length 659.8
  Bottom Layer w40: DS6.2 7175,5385 R33.2
NetDS6_4: DS6.4 R30.2 | length 703.3
  Bottom Layer w40: DS6.4 7375,5490 R30.2
NetDS6_6: DS6.6 R27.2 | length 1812.1
  Bottom Layer w40: DS6.6 7791.57,6270 7827.5,6234.07 7827.5,5085.83 7825,5083.33 7825,5070.93 7791.57,5037.5 7675,5037.5 R27.2@7592.5,5120
NetDS6_7: DS6.7 R24.2 | length 2780.5
  Bottom Layer w40: R24.2 7135,5033.43 7190.93,4977.5 7832.5,4977.5 7885,5030 7885,5058.47 7887.5,5060.97 7887.5,6331.57 7864.07,6355 7393.43,6355 7380.74,6342.31 7380.74,6275.74 DS6.7
NetDS6_9: DS6.9 R39.2 | length 1614.1
  Bottom Layer w40: R39.2 6830,6291.57 6893.43,6355 7151.57,6355 7169.26,6337.31 7169.26,6275.74 DS6.9
NetDS6_10: DS6.10 R42.2 | length 1228.8
  Bottom Layer w40: R42.2@6982.5,5120 6982.5,6246.57 7000.19,6264.26 7069.26,6264.26 DS6.10
NetIC1_9: IC1.9 R13.1 | length 1572.2
  Bottom Layer w40: R13.1@972.5,4720 972.5,4861.57 995.93,4885 1541.57,4885 1565,4861.57 1565,4655 1209.71,4299.71 IC1.9@1209.71,4190
NetIC1_10: IC1.10 R10.1 | length 1226.4
  Bottom Layer w40: IC1.10@1109.71,4190 1109.71,4284.71 1502.5,4677.5 1502.5,4754.17 1441.67,4815 1136.49,4815 1113.05,4791.57 1113.05,4728.61 R10.1@1121.66,4720
NetIC1_11: IC1.11 R7.1 | length 699.9
  Bottom Layer w40: IC1.11@1009.71,4190 1009.71,4309.71 R7.1
NetIC1_12: IC1.12 R4.1 | length 679.6
  Bottom Layer w40: IC1.12@909.71,4190 909.71,4358.87 R4.1@1270.83,4720
NetIC1_13: IC1.13 R1.1 | length 535.6
  Bottom Layer w40: IC1.13@809.71,4190 809.71,4205 823.33,4218.63 R1.1@823.33,4720
NetIC1_14: IC1.14 R19.1 | length 544.7
  Bottom Layer w40: R19.1@674.16,4720 674.16,4240.54 709.71,4205 IC1.14@709.71,4190
NetIC1_15: IC1.15 R16.1 | length 565.1
  Bottom Layer w40: R16.1 525,4284.55 609.71,4199.84 IC1.15@609.71,4190
NetIC2_9: IC2.9 R14.1 | length 1457.5
  Bottom Layer w40: R14.1 3475,4851.57 3498.43,4875 3956.42,4875 4060,4771.42 4060,4613.56 3801.82,4355.38 IC2.9@3801.82,4190
NetIC2_10: IC2.10 R11.1 | length 1170.4
  Bottom Layer w40: R11.1@3618.33,4720 3626.94,4728.61 3626.94,4798.51 3643.43,4815 3931.57,4815 4000,4746.57 4000,4638.41 3701.82,4340.23 IC2.10@3701.82,4190
NetIC2_11: IC2.11 R8.1 | length 655.6
  Bottom Layer w40: IC2.11@3601.82,4190 3601.82,4416.82 R8.1
NetIC2_12: IC2.12 R5.1 | length 637.6
  Bottom Layer w40: IC2.12@3501.82,4190 3501.82,4460.16 R5.1@3761.66,4720
NetIC2_13: IC2.13 R2.1 | length 559.1
  Bottom Layer w40: R2.1@3331.66,4720 3331.66,4270 3401.82,4199.84 IC2.13@3401.82,4190
NetIC2_14: IC2.14 R20.1 | length 577
  Bottom Layer w40: R20.1@3188.33,4720 3188.33,4313.33 3301.82,4199.84 IC2.14@3301.82,4190
NetIC2_15: IC2.15 R17.1 | length 595
  Bottom Layer w40: R17.1 3045,4356.67 3201.82,4199.84 IC2.15@3201.82,4190
NetIC3_9: IC3.9 R15.1 | length 1392.7
  Bottom Layer w40: R15.1 5968.61,4728.61 5968.61,4813.61 6020,4865 6466.53,4865 6552.5,4779.03 6552.5,4652.5 6393.94,4493.94 IC3.9
NetIC3_10: IC3.10 R12.1 | length 1121.2
  Bottom Layer w40: R12.1 6118.61,4728.61 6118.61,4790.18 6133.43,4805 6441.67,4805 6492.5,4754.17 6492.5,4677.35 6293.94,4478.79 IC3.10
NetIC3_11: IC3.11 R9.1 | length 619.5
  Bottom Layer w40: IC3.11 6193.94,4503.94 R9.1
NetIC3_12: IC3.12 R6.1 | length 598.8
  Bottom Layer w40: IC3.12 6093.94,4553.94 R6.1
NetIC3_13: IC3.13 R3.1 | length 606.2
  Bottom Layer w40: R3.1 5993.94,4536.06 IC3.13
NetIC3_14: IC3.14 R21.1 | length 626.9
  Bottom Layer w40: R21.1 5893.94,4486.06 IC3.14
NetIC3_15: IC3.15 R18.1 | length 647.6
  Bottom Layer w40: R18.1 5793.94,4436.06 IC3.15
NetIC7_9: IC7.9 R34.1 | length 1458.8
  Bottom Layer w40: R34.1@2217.5,4720 2226.11,4728.61 2226.11,4841.57 2249.54,4865 2450.97,4865 2453.47,4862.5 2719.03,4862.5 2802.5,4779.03 2802.5,4660.97 2742.5,4600.97 2742.5,4599.78 2505.76,4363.04 IC7.9@2505.76,4190
NetIC7_10: IC7.10 R31.1 | length 1166.4
  Bottom Layer w40: R31.1 2373.61,4728.61 2373.61,4781.57 2394.54,4802.5 2694.17,4802.5 2742.5,4754.17 2742.5,4685.83 2405.76,4349.09 IC7.10@2405.76,4190
NetIC7_11: IC7.11 R28.1 | length 676.7
  Bottom Layer w40: IC7.11@2305.76,4190 2305.76,4365.76 R28.1
NetIC7_12: IC7.12 R25.1 | length 657.1
  Bottom Layer w40: IC7.12@2205.76,4190 2205.76,4413.27 R25.1@2512.5,4720
NetIC7_13: IC7.13 R22.1 | length 544.8
  Bottom Layer w40: R22.1 2070,4240.77 2105.76,4205 IC7.13@2105.76,4190
NetIC7_14: IC7.14 R40.1 | length 564.5
  Bottom Layer w40: R40.1@1922.5,4720 1922.5,4283.11 2005.76,4199.84 IC7.14@2005.76,4190
NetIC7_15: IC7.15 R37.1 | length 584.2
  Bottom Layer w40: R37.1 1775,4330.61 1905.76,4199.84 IC7.15@1905.76,4190
NetIC8_9: IC8.9 R35.1 | length 1383.8
  Bottom Layer w40: R35.1@4692.5,4720 4692.5,4827.5 4727.5,4862.5 5179.03,4862.5 5262.5,4779.03 5262.5,4657.5 5100,4495 5100,4192.12 IC8.9
NetIC8_10: IC8.10 R32.1 | length 1093.8
  Bottom Layer w40: R32.1 4843.61,4728.61 4843.61,4766.57 4879.54,4802.5 5154.17,4802.5 5202.5,4754.17 5202.5,4685.83 5154.17,4637.5 5152.5,4637.5 4997.88,4482.88 IC8.10
NetIC8_11: IC8.11 R29.1 | length 622
  Bottom Layer w40: IC8.11 4897.88,4497.88 R29.1
NetIC8_12: IC8.12 R26.1 | length 604.4
  Bottom Layer w40: IC8.12 4797.88,4540.38 R26.1@4977.5,4720
NetIC8_13: IC8.13 R23.1 | length 591.3
  Bottom Layer w40: R23.1 4697.88,4572.12 IC8.13
NetIC8_14: IC8.14 R41.1 | length 608.9
  Bottom Layer w40: R41.1@4407.5,4720 4597.88,4529.62 IC8.14
NetIC8_15: IC8.15 R38.1 | length 626.5
  Bottom Layer w40: R38.1 4497.88,4487.12 IC8.15
NetIC9_9: IC9.9 R36.1 | length 1432.7
  Bottom Layer w40: R36.1@7287.5,4720 7287.5,4836.57 7310.93,4860 7430.15,4860 7432.65,4862.5 7804.03,4862.5 7887.5,4779.03 7887.5,4622.5 7690,4425 IC9.9
NetIC9_10: IC9.10 R33.1 | length 1138.8
  Bottom Layer w40: R33.1 7448.61,4728.61 7448.61,4787.68 7463.43,4802.5 7779.17,4802.5 7827.5,4754.17 7827.5,4682.5 7590,4445 IC9.10
NetIC9_11: IC9.11 R30.1 | length 635.6
  Bottom Layer w40: IC9.11 7490,4465 R30.1
NetIC9_12: IC9.12 R27.1 | length 613.9
  Bottom Layer w40: IC9.12 7390,4517.5 R27.1@7592.5,4720
NetIC9_13: IC9.13 R24.1 | length 594.2
  Bottom Layer w40: R24.1 7135,4354.84 7290,4199.84 IC9.13
NetIC9_14: IC9.14 R42.1 | length 615.9
  Bottom Layer w40: R42.1@6982.5,4720 6982.5,4407.34 7190,4199.84 IC9.14
NetIC9_15: IC9.15 R39.1 | length 637.7
  Bottom Layer w40: R39.1 6830,4459.84 7090,4199.84 IC9.15
NetR43_1: R43.1 R45.2 SW1.2 U2.5 | length 1460.3
  Bottom Layer w40: R45.2 1320,1796.57 1343.43,1820 1895,1820 1900,1825 ; U2.5 1900,1825 ; R43.1 2316.39,1749.69 2316.39,1694.82 2301.57,1680 SW1.2 1870,1689.47 1900,1719.47 1900,1825
NetR44_1: R44.1 R46.2 SW2.2 U3.5 | length 1823.7
  Bottom Layer w40: SW2.2 5631.57,1705 5662.5,1674.07 5662.5,1672.9 5875,1460.4 R44.1 5925,1340 6475,1340 ; U3.5 6475,1340 ; R46.2 6900,1340 6475,1340
NetR47_1: R47.1 U1.10 | length 730.3
  Bottom Layer w40: U1.10 3775,1983.43 3798.43,1960 4078.3,1960 R47.1
P1: IC2.7 IC5.1 IC5.12 | length 2054.4
  Bottom Layer w45: IC5.1 3622.5,2943 3622.5,3025.47 IC5.12@3815,3217.97 ; IC2.7 3699.71,3878.22 3792.84,3785.09 3874.87,3785.09 4352.5,3307.45 4352.5,3163.55 4271.95,3083 3958.05,3083 3893.05,3148 3884.97,3148 IC5.12@3815,3217.97 ; IC5.12 IC5.12@3815,3217.97
P2: D5.2 IC2.1 IC5.9 | length 1735.1
  Top Layer w40: v1(3295,3565) 3300,3560 v1(3585,3560)
  Bottom Layer w40: v1(3585,3560) 3817.63,3560 4065,3312.63 4065,3305.91 4115,3255.91 IC5.9
  Bottom Layer w45: IC2.1 3099.71,3760.29 3360,3500 D5.2
P3: D6.2 IC2.2 IC5.8 | length 2358.8
  Bottom Layer w45: D6.2 3030,3106.36 3056.36,3080 3365.1,3080 3458.47,3173.36 3458.47,3619.46 ; IC2.2 3199.71,3878.22 3458.47,3619.46 ; IC5.8 4215,3253.03 3845.53,3622.5 3559.11,3622.5 3556.07,3619.46 3458.47,3619.46
P4: IC2.6 IC5.11 | length 1529.5
  Bottom Layer w45: IC2.6 3599.71,3783.05 3695.26,3687.5 3880.53,3687.5 4287.5,3280.53 4287.5,3190.47 4245.03,3148 3984.97,3148 3915,3217.97 IC5.11
P5: IC8.7 IC11.1 IC11.12 | length 1863.1
  Bottom Layer w45: IC11.1 4550,3030 4642.17,3122.17 4654.2,3122.17 IC11.12@4750,3217.97 ; IC11.12 IC11.12@4750,3217.97 ; IC8.7 4997.88,3878.3 5287.5,3588.68 5287.5,3163.55 5206.95,3083 4884.97,3083 IC11.12@4750,3217.97
P6: IC8.1 IC11.9 | length 963.8
  Bottom Layer w40: IC8.1 4397.88,3880.16 4407.41,3870.63 4409.08,3870.63 4559.71,3720 4625,3720 5043.47,3301.53 5043.47,3271.17 5046.17,3268.47 5046.17,3239.33 IC11.9
P7: IC8.2 IC11.8 | length 992.1
  Bottom Layer w40: IC8.2 4497.88,3881.83 4599.71,3780 4715,3780 5150,3345 IC11.8
P8: IC5.14 IC8.6 IC11.11 | length 2760.9
  Top Layer w40: v1(3615,3410) v1(4690,3410)
  Bottom Layer w40: IC5.14 v1(3615,3410) ; v1(4690,3410) 4850,3250 IC11.11
  Bottom Layer w45: IC11.11 4850,3217.97 4919.97,3148 5180.03,3148 5222.5,3190.47 5222.5,3553.68 4897.88,3878.3 IC8.6
PHUT: D4.2 D7.1 D8.1 IC6.2 IC6.3 IC11.14 | length 4803.3
  Bottom Layer w45: IC11.14 4550,3466.7 4245.85,3770.84 4245.85,3980.11 4317.61,4051.87 5268.13,4051.87 5352.5,3967.5 5352.5,2812.5 5378.86,2786.14 5483.86,2786.14 D7.1 ; D4.2 5455,2740.12 5485,2770.12 D7.1 ; IC6.3 IC6.2 6225,2811.36 6198.64,2785 D8.1 D7.1
Q14: IC13.3 U1.3 | length 5766.9
  Bottom Layer w40: U1.3 4177.86,2467.86 4177.86,2524.42 4203.43,2550 4966.57,2550 4990,2526.57 4990,1555.93 5073.43,1472.5 5557.5,1472.5 5625,1405 5625,1296.86 5701.86,1220 7087.84,1220 7152.5,1284.66 7152.5,1737.5 7045,1845 6335,1845 6295,1885 IC13.3
S1: IC3.7 IC6.1 IC6.12 | length 1367.6
  Bottom Layer w40: IC6.1 6125,3035.5 6214.48,3124.99 6229.48,3124.99 6325,3220.5 6325,3699.75 6463.94,3838.69 6463.94,3928.17 6422.74,3969.37 6363.47,3969.37 6293.94,3899.84 IC3.7
S2: D7.2 IC3.1 IC6.9 | length 2751.1
  Bottom Layer w40: D7.2 5490,3240 5661.57,3240 5693.94,3272.37 IC3.1 5703.47,3899.53 5703.47,3909.37 5883.47,4089.37 6636.57,4089.37 6660,4065.94 6660,3284.49 6632.04,3256.53 6632.04,3242.54 IC6.9
S3: D8.2 IC3.2 IC6.8 | length 1936.1
  Top Layer w40: v1(5790,3580) v1(6725,3580)
  Bottom Layer w40: D8.2 5790,3862.74 5790.3,3863.04 5790.3,3886.35 IC3.2 ; IC6.8 v1(6725,3580)
S4: IC3.6 IC6.11 | length 1183.6
  Bottom Layer w40: IC3.6 6193.94,3899.84 6263.47,3969.37 6268.99,3969.37 6328.99,4029.37 6447.59,4029.37 6523.94,3953.02 6523.94,3813.84 6463.47,3753.37 6463.47,3287.96 6425,3249.49 IC6.11
S5: IC9.7 IC12.1 IC12.12 | length 1163.7
  Bottom Layer w40: IC12.1 7085,3020.5 7285,3220.5 IC12.12 7285,3430 7590,3735 IC9.7
S6: IC9.1 IC12.9 | length 2249.2
  Bottom Layer w40: IC9.1 6990,3899.84 7179.53,4089.37 7768.5,4089.37 7879.53,3978.35 7879.53,3157.96 7846.57,3125 7608.43,3125 7585,3148.43 IC12.9
S7: IC9.2 IC12.8 | length 1663.2
  Bottom Layer w40: IC9.2 7090,3899.84 7219.53,4029.37 7743.65,4029.37 7819.53,3953.49 7819.53,3258.93 7796.1,3235.5 IC12.8
S8: IC6.14 IC9.6 IC12.11 | length 2792.8
  Top Layer w40: v1(6125,3490) v1(7490,3490)
  Bottom Layer w40: IC6.14 v1(6125,3490) ; IC12.11 7385,3385 v1(7490,3490) 7759.53,3759.53 7759.53,3928.64 7718.8,3969.37 7559.53,3969.37 7490,3899.84 IC9.6
XUNG: IC12.14 IC13.1 | length 2170.5
  Bottom Layer w40: IC13.1 6090,2025 6085,2030 6095,2040 6095,2201.57 6118.43,2225 6976.57,2225 7000,2248.43 7000,3212.07 7023.43,3235.5 IC12.14
pads on no net: DS1.5 DS2.5 DS3.5 DS4.5 DS5.5 DS6.5 IC1.4 IC2.4 IC3.4 IC4.4 IC4.13 IC5.4 IC5.13 IC6.4 IC6.13 IC7.4 IC8.4 IC9.4 IC10.4 IC10.13 IC11.4 IC11.13 IC12.4 IC12.13 IC13.8 IC13.9 IC13.10 IC13.11 IC13.12 IC13.13 IC13.14 U1.1 U1.2 U1.4 U1.5 U1.6 U1.7 U1.8 U1.9 U1.13 U1.14 U1.15 U2.1 U2.2 U2.3 U2.4 U2.7 U2.8 U2.9 U2.10 U2.11 U2.12 U2.13 U2.14 U3.1 U3.2 U3.3 U3.4 U3.7 U3.8 U3.9 U3.10 U3.11 U3.12 U3.13 U3.14

## Polygon pours and split planes (outlines as drawn)
GND on Bottom Layer "GND_L02_P000" (solid, remove dead copper, pour order 0): 0,1075 8105,1075 8105,6810 0,6810

## Other copper
Bottom Layer:
  text "HOP - TUNG - HAI" at 2430,1362.17 h180

## Silkscreen, mask and mechanical layers (free items; w line width, h text height)
Mechanical 1:
  lines w10: -5,1075 -5,6810 8105,6810 8105,1075 -5,1075

## Text inside footprints (layer, text, board x,y; h text height)
IC1: Top Overlay "DIP-16" at 689.71,4009.92 h59.05
IC2: Top Overlay "DIP-16" at 3279.71,4009.92 h59.05
IC3: Top Overlay "DIP-16" at 5873.94,4010 h59.05
IC7: Top Overlay "DIP-16" at 1984.71,4009.92 h59.05
IC8: Top Overlay "DIP-16" at 4577.88,4010 h59.05
IC9: Top Overlay "DIP-16" at 7170,4010 h59.05